# Altium PCB Node Controller v2 - old.PcbDoc
Units mil, origin at the board's own origin, x right, y up, seen from the top; angles counter-clockwise.
Board outline 2440.94 x 1377.95 mil, 2 copper layers (Top Layer, Bottom Layer); 38 components, 27 nets, 150 pads, 64 vias.
Unrouted connection lines stored in the file: 4.
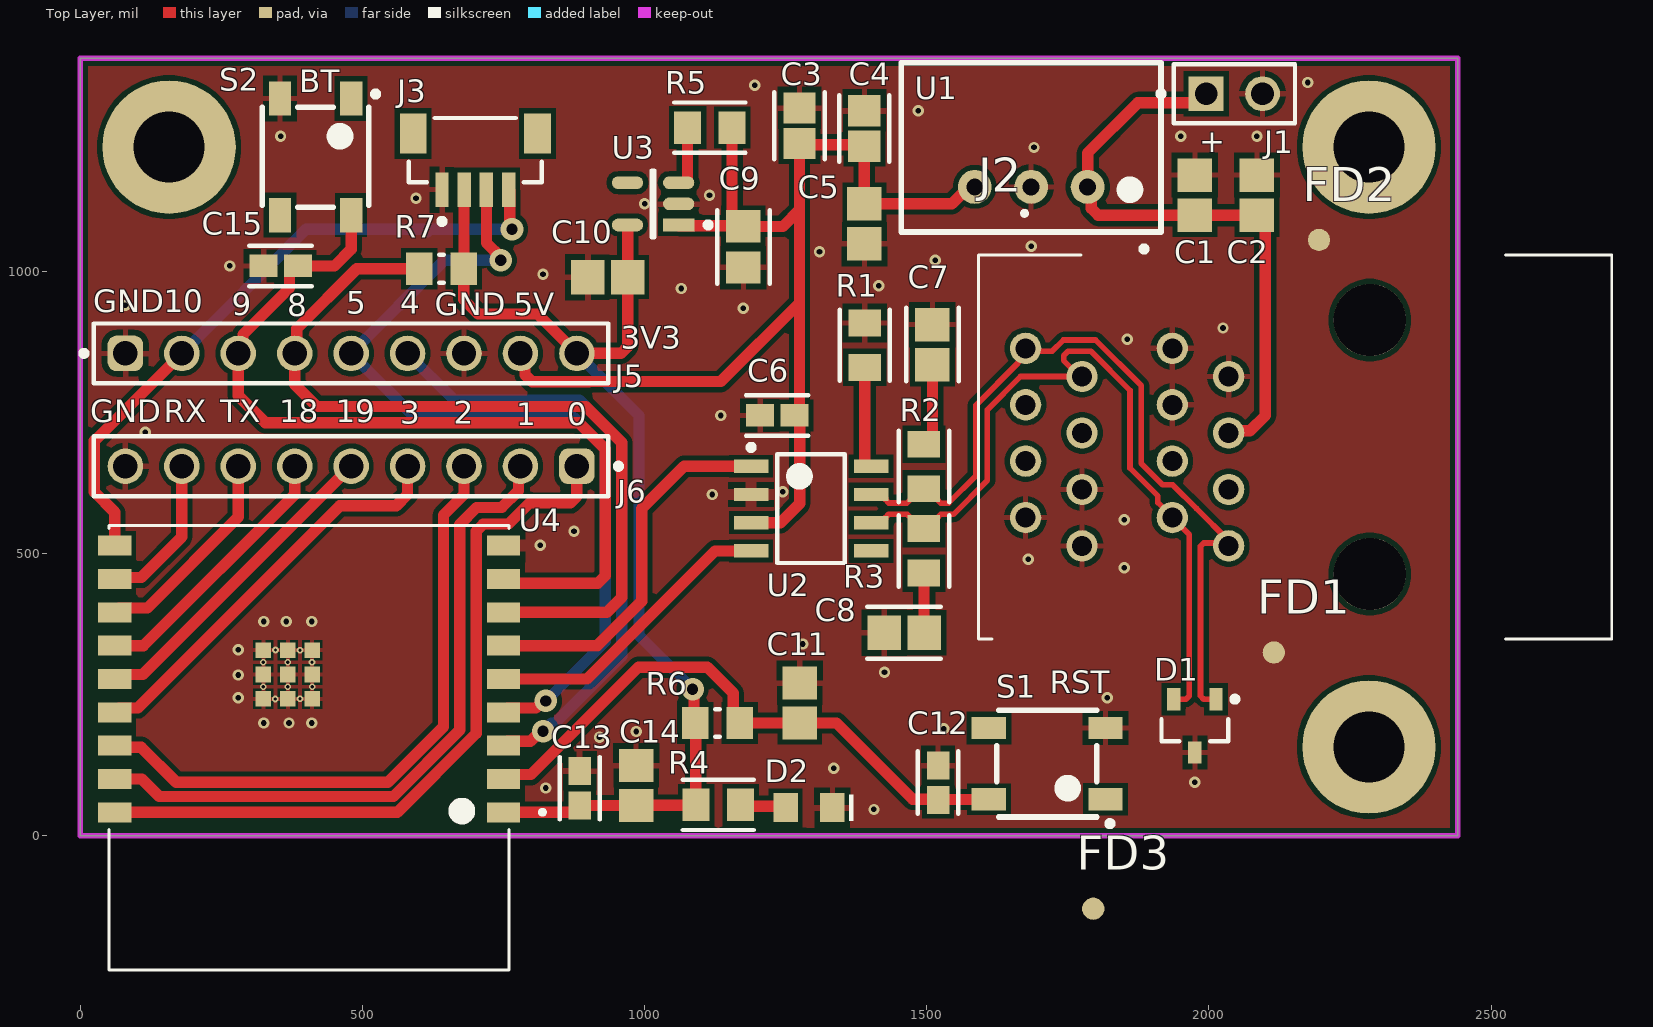
[diagram p0: Top Layer view]
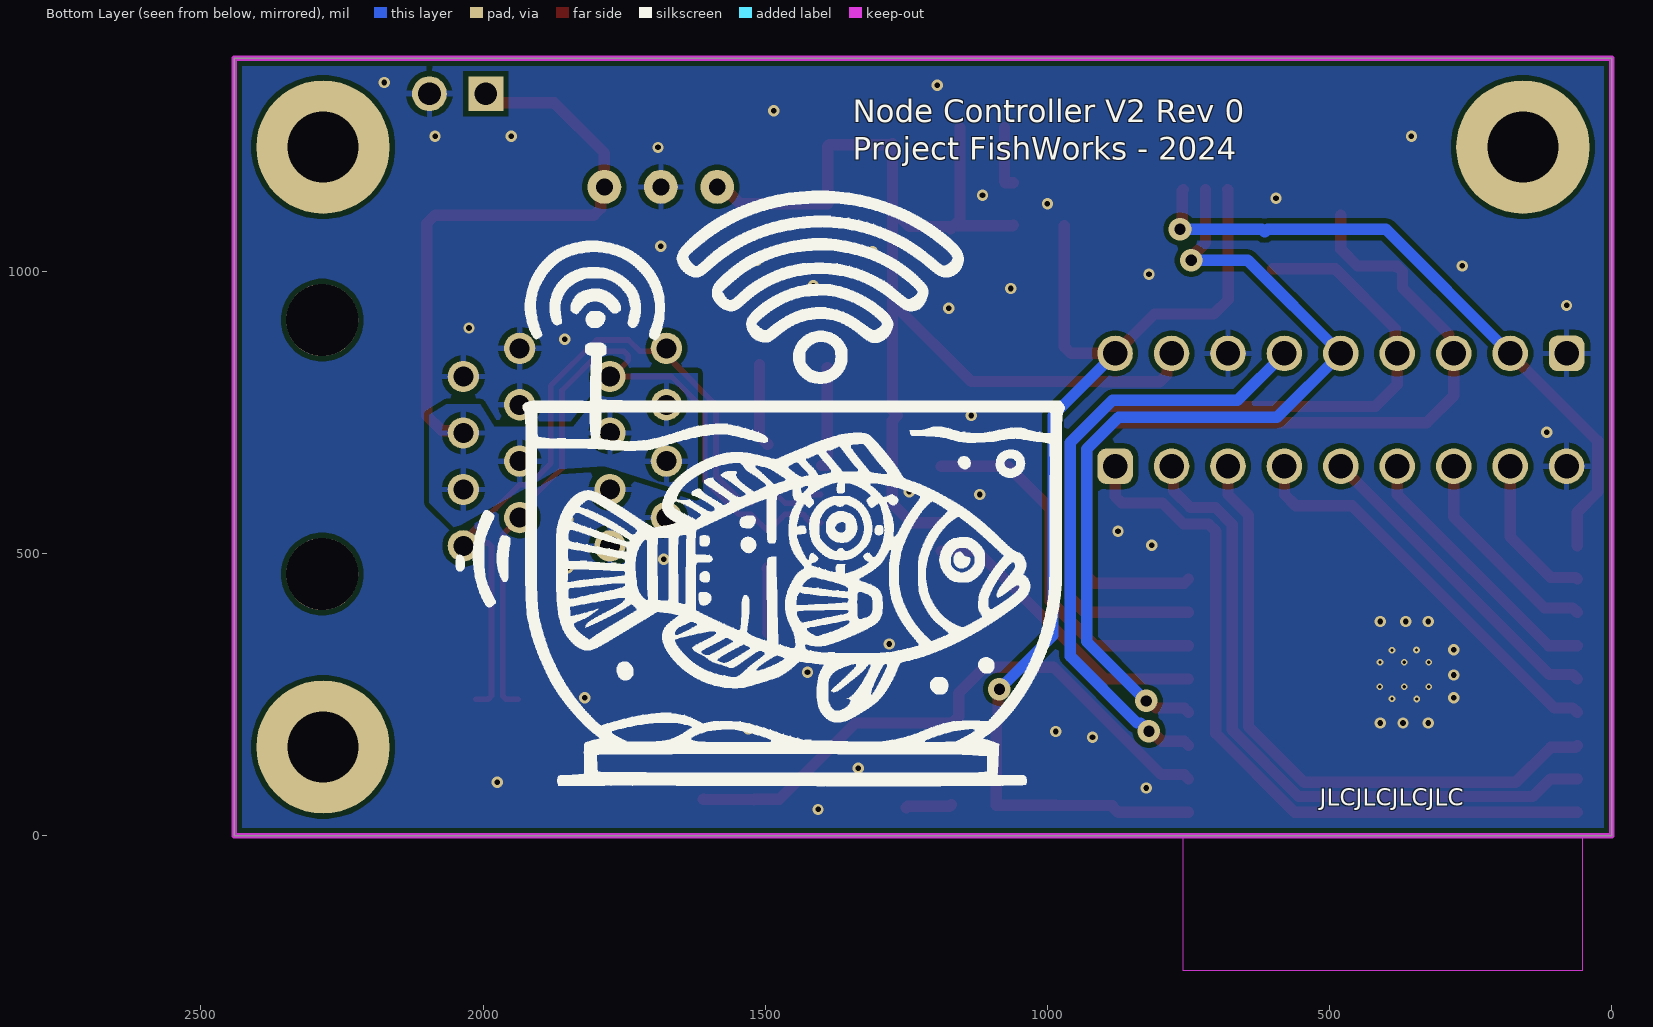
[diagram p1: Bottom Layer view, seen from below]
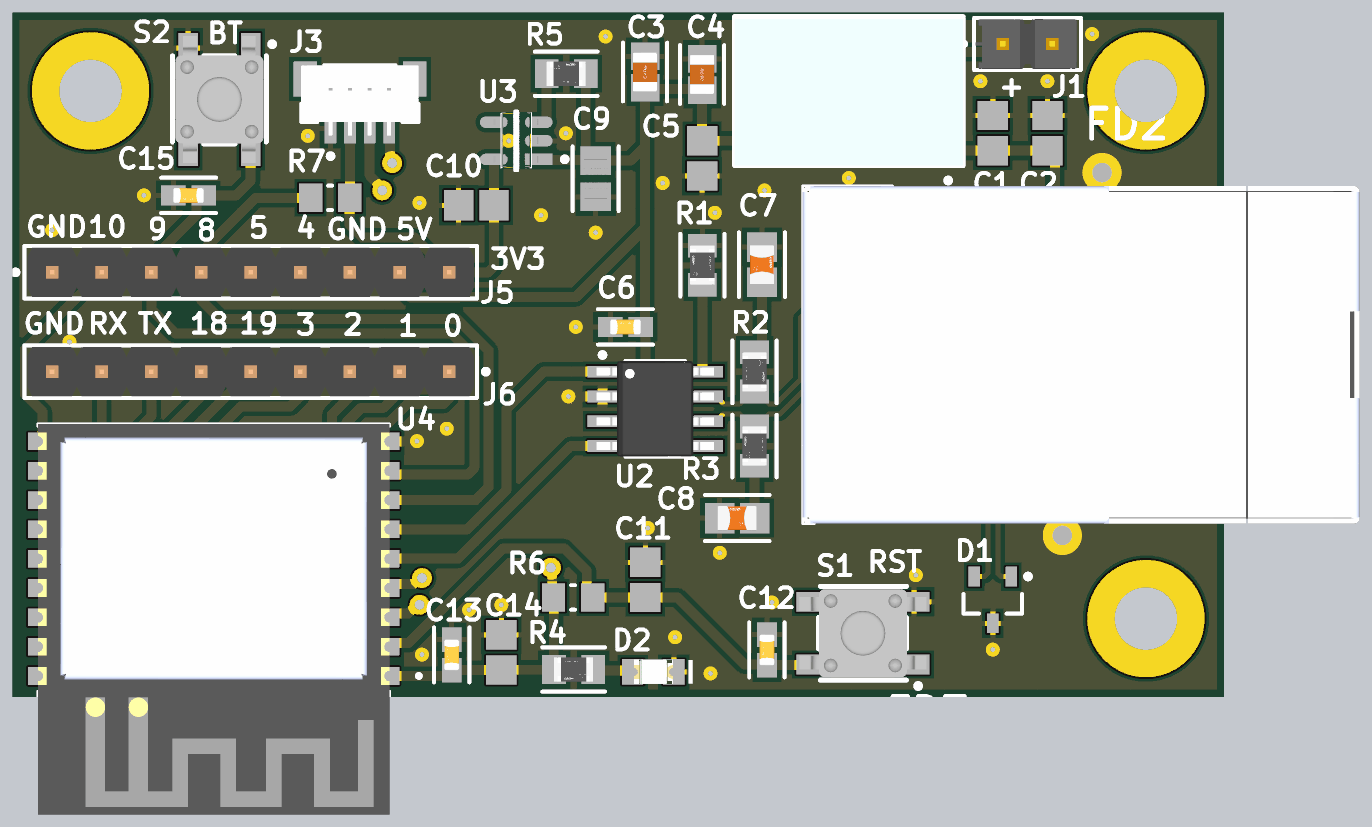
[diagram p2: 3D render of the assembled board from above, using the file's embedded part models]

## Layer stack, top to bottom
Top Solder: solder mask 0.4, Solder Resist, Dk 3.5
Top Layer: signal copper 1.4
Dielectric 1: dielectric 12.6, FR-4, Dk 4.8
Bottom Layer: signal copper 1.4
Bottom Solder: solder mask 0.4, Solder Resist, Dk 3.5

## Board outline
0,0 0,1377.95 2440.94,1377.95 2440.94,0

## Design rules (kind name [scope] priority, off if disabled: settings)
Clearance [All] p1: gap=9 ignorepadtopadclearanceinfootprint=TRUE except(3.94: Arc-Arc Arc-Track Track-Track; 11: Arc-Hole Track-Hole)
DiffPairsRouting [All] p1: maxlimit=30 minlimit=7 mostfreqgap=10 toplayer_minwidth=10 toplayer_maxwidth=20 toplayer_prefwidth=10 bottomlayer_minwidth=10 bottomlayer_maxwidth=20 bottomlayer_prefwidth=10 maxuncoupledlength=500
HoleSize [All] p1: absolutevalues=TRUE maxlimit=248.03 minlimit=5.91 maxpercent=80.000 minpercent=20.000
MinimumSolderMaskSliver [All] p1: minsoldermaskwidth=3.94
PlaneClearance [All] p1: clearance=9
PlaneConnect [All] p1: planeconnectstyle=Relief reliefexpansion=10 reliefentries=4 reliefconductorwidth=10 reliefairgap=10
PolygonConnect PolygonConnect_ESP32 [HasFootprint('ESP32-C3-WROOM-02')] p1: thpad.connectstyle=Relief thpad.reliefconductorwidth=10 thpad.reliefentries=4 thpad.polygonreliefangle="90 Angle" thpad.airgapwidth=10 smdpad.connectstyle=Relief smdpad.reliefconductorwidth=8 smdpad.reliefentries=4 smdpad.polygonreliefangle="90 Angle" smdpad.airgapwidth=4 via.connectstyle=Relief via.reliefconductorwidth=10 via.reliefentries=4 via.polygonreliefangle="90 Angle" via.airgapwidth=10
PolygonConnect [All] p2: connectstyle=Relief reliefconductorwidth=10 reliefentries=4 polygonreliefangle="90 Angle" airgapwidth=10
RoutingVias [All] p1: holewidth=20 width=40 viastyle="Through Hole" minholewidth=10 minwidth=20 maxholewidth=20 maxwidth=40
SolderMaskExpansion [All] p1: expansion=4 istentingtop=FALSE
SupplyNets "Schematic Supply Nets_3" [InNet('GND')] p1: voltage=0.000
SupplyNets "Schematic Supply Nets_2" [InNet('+24V')] p2: voltage=0.000
SupplyNets "Schematic Supply Nets_1" [InNet('+5.0V')] p3: voltage=0.000
SupplyNets "Schematic Supply Nets" [InNet('+3.3V')] p4: voltage=0.000
Width [All] p1: maxlimit=160 minlimit=4 preferedwidth=20 minimp=50.000000 maximp=50.000000 favimp=50.000000
25 further rules are at their usual default settings.

## Classes and differential pairs
differential pair CAN: +CAN_P -CAN_N

## Components (designator, comment, footprint, x,y, rotation, side; value= is the part's Value field where it differs from the comment)
C1 "10uF" CAPC2013X145X50ML20T25 1975,1135.43 r270 top
C2 "10uF" CAPC2013X145X50ML20T25 2085,1135.43 r270 top
C3 "22uF" FP-GMC21R-IPC_B 1274.45,1258.49 r90 top
C4 "22uF" FP-GMC21R-IPC_B 1389.45,1253.49 r90 top
C5 "10uF" CAPC2013X145X50ML20T25 1389.45,1084.57 r90 top
C6 "0.1uF" FP-CC0603-DA-IPC_A 1235,745 r180 top value=100nF
C7 "560pF" FP-CC0805-0_85-IPC_A 1510,870.46 r90 top
C8 "560pF" FP-CC0805-0_85-IPC_A 1460,360 r180 top
C9 "1uF" FP-CL21-IPC_A 1175,1043.55 r270 top value=1µF
C10 "10uF" CAPC2013X145X50ML20T25 934.57,990 r0 top
C11 "10uF" CAPC2013X145X50ML20T25 1275,235.43 r270 top
C12 "0.1uF" FP-CC0603-DA-IPC_A 1520,94.41 r270 top value=100nF
C13 "0.1uF" FP-CC0603-DA-IPC_A 885,84.41 r270 top value=100nF
C14 "10uF" CAPC2013X145X50ML20T25 985,89.25 r270 top
C15 "0.1uF" FP-CC0603-DA-IPC_A 355,1010 r0 top value=100nF
D1 "DESD1CAN2SOQ-7" SOT95P245X110-3N 1975,195 r270 top
D2 "150080VS75000" WL-SMCW_0805_150080xx75000 1291.34,50 r180 top
FD1 "JLC FID1X2R" FID1X2R 2115,325 r0 top
FD2 "JLC FID1X2R" FID1X2R 2195,1056 r90 top
FD3 "JLC FID1X2R" FID1X2R 1795,-129 r90 top
J1 "TSW-102-07-G-S" FP-TSW-102-07-G-S-MFG 2045,1315 r0 top
J2 "E5908-0T0343-L" E5908-0T0343-L-Footprint-1 2285,688.98 r90 top
J3 "BM04B-SRSS-TBT(LF)(SN)" FP-BM04B-SRSS-TBT_LF_SN-MFG 700,1215 r0 top
J5 "61300911121" 61300911121 480,855 r0 top
J6 "61300911121" 61300911121 480,655 r180 top
R1 "4.7k" FP-RT0805-IPC_A 1390,869.45 r90 top value=4.7kR
R2 "100" FP-RT0805-0_6-IPC_A 1495,654.45 r270 top value=100R
R3 "100" FP-RT0805-0_6-IPC_A 1495,505 r90 top value=100R
R4 "1.5k" FP-RT0805-IPC_A 1130.55,55 r180 top value=1.5kR
R5 "100k" FP-RT0805-IPC_A 1115.55,1255 r0 top value=100kR
R6 "10k" RESC2013X60X35ML10T20 1129.37,200 r180 top value=10kR
R7 "10k" RESC2013X60X35ML10T20 640,1005 r0 top value=10kR
S1 "PTS647SN50SMTR2LFS" PTS647SN50SMTR2LFS-Footprint-1 1816.69,65 r180 top
S2 "PTS647SN50SMTR2LFS" PTS647SN50SMTR2LFS-Footprint-1 480,1306.69 r270 top
U1 "TR10S05" TR10S05-Footprint-1 1785,1150 r180 top
U2 "MCP2551-I/SN" MCHP-SN8_V 1295,580 r0 top
U3 "AP2112K-3.3TRG1" FP-SOT25-IPC_B 1015,1120 r180 top
U4 "ESP32-C3-WROOM-02" ESP32-C3-WROOM-02 750,41.89 r180 top

## Footprints (in the part's own frame and the unit in brackets; to place one, negate y for a bottom-side part, rotate by r counter-clockwise, add the part's x,y. Pads: shape width x height; smd on the part's side, far side on the other; paste and mask are expansions set on the pad)
61300911121 [mm] "Pin Header, pitch 2.54 mm, THT, Vertical, single row, 9p"
  rrect50% 1.6x1.6 hole 1.1: 1(-10.16,0)
  round 1.6 hole 1.1: 2(-7.62,0) 3(-5.08,0) 4(-2.54,0) 5(0,0) 6(2.54,0) 7(5.08,0) 8(7.62,0) 9(10.16,0)
  silkscreen extent -12.15,-1.35 11.58,1.35, body extent -11.43,-1.27 11.43,1.27, height 8.57
CAPC2013X145X50ML20T25 [mm] "Chip Capacitor, 2-Leads, Body 2.00x1.25mm, IPC Low Density"
  rect 1.5x1.55 smd: 1(-0.9,0) 2(0.9,0)
  body extent -1.1,-0.72 1.1,0.72, height 1.45
E5908-0T0343-L-Footprint-1 [mm]
  round 1.408 hole 0.9: 1B(-4.445,6.35) 1T(4.445,15.49) 2B(-3.175,8.89) 2T(3.175,12.95) 3B(-1.905,6.35) 3T(1.905,15.49) 4B(-0.635,8.89) 4T(0.635,12.95) 5B(0.635,6.35) 5T(-0.635,15.49) 6B(1.905,8.89) 6T(-1.905,12.95) 7B(3.175,6.35) 7T(-3.175,15.49) 8B(4.445,8.89) 8T(-4.445,12.95)
  round 3.25 hole 3.25 unplated: ""(-5.715,0) ""(5.715,0)
  silkscreen extent -8.64,-10.89 10.62,17.61, body extent -8.64,-10.89 8.64,17.61, height 25.3
ESP32-C3-WROOM-02 [mm]
  rect 1.5x0.9 smd: 1(0,0) 2(0,-1.5) 3(0,-3) 4(0,-4.5) 5(0,-6) 6(0,-7.5) 7(0,-9) 8(0,-10.5) 9(0,-12) 10(17.5,-12) 11(17.5,-10.5) 12(17.5,-9) 13(17.5,-7.5) 14(17.5,-6) 15(17.5,-4.5) 16(17.5,-3) 17(17.5,-1.5) 18(17.5,0)
  rect 0.7x0.7 smd: 19(8.61,-5.1) 19(8.61,-7.3) 19(8.61,-6.2) 19(9.71,-5.1) 19(9.71,-7.3) 19(9.71,-6.2) 19(10.81,-5.1) 19(10.81,-7.3) 19(10.81,-6.2)
  Keep-Out Layer region: 17.75,1.1 -0.25,1.1 -0.25,7.1 17.75,7.1
  Keep-Out Layer region: 17.75,1.1 -0.25,1.1 -0.25,7.1 17.75,7.1
  silkscreen extent -1.85,-12.9 17.75,7.1, body extent -0.25,-12.9 17.75,7.1, height 3.35
FID1X2R [mm] "Fiducial - Round 1x2mm"
  round 1 smd mask-2539.97: 0(0,0)
FP-BM04B-SRSS-TBT_LF_SN-MFG [mm]
  rect 0.6x1.55 smd paste+0 mask+0: 1(-1.5,-1.775) 2(-0.5,-1.775) 3(0.5,-1.775) 4(1.5,-1.775)
  rect 1.2x1.8 smd paste+0 mask+0: 5(-2.8,0.75) 6(2.8,0.75)
  silkscreen extent -3,-3.32 3,1.45, body extent -3.5,-2.65 3.5,1.75, height 0.25
FP-CC0603-DA-IPC_A [mil]
  rect 49.53x39.85 smd paste+0 mask+0: 1(-30.59,0) 2(30.59,0)
  silkscreen extent -55,-36 55,36, body extent -75,-40 75,40, height 10
FP-CC0805-0_85-IPC_A [mil]
  rect 59.24x61.27 smd paste+0 mask+0: 1(-35.46,0) 2(35.46,0)
  silkscreen extent -65,-46 65,46, body extent -85,-50 85,50, height 10
FP-CL21-IPC_A [mil]
  rect 57.27x61.27 smd paste+0 mask+0: 1(-36.45,0) 2(36.45,0)
  silkscreen extent -65,-46 65,46, body extent -85,-50 85,50, height 10
FP-GMC21R-IPC_B [mil]
  rect 55.25x57.33 smd paste+0 mask+0: 1(-31.51,0) 2(31.51,0)
  silkscreen extent -59,-44 59,44, body extent -69,-39 69,39, height 10
FP-RT0805-0_6-IPC_A [mil]
  rect 47.56x57.56 smd paste+0 mask+0: 1(-39.45,0) 2(39.45,0)
  silkscreen extent -63,-45 63,45, body extent -83,-48 83,48, height 10
FP-RT0805-IPC_A [mil]
  rect 47.56x57.56 smd paste+0 mask+0: 1(-39.45,0) 2(39.45,0)
  silkscreen extent -63,-45 63,45, body extent -83,-48 83,48, height 10
FP-SOT25-IPC_B [mm]
  rect 1.407x0.576 smd paste+0 mask+0: 1(-1.151,0.95)
  rrect100% 1.407x0.576 smd paste+0 mask+0: 2(-1.151,0) 3(-1.151,-0.95) 4(1.151,-0.95) 5(1.151,0.95)
  silkscreen extent -2.6,-1.5 0.05,1.5, body extent -2.1,-1.75 2.1,1.75, height 0.25
FP-TSW-102-07-G-S-MFG [mm]
  rect 1.57x1.57 hole 1.02 paste-2539.97 mask+0: 1(-1.27,0)
  round 1.57 hole 1.02 paste-2539.97 mask+0: 2(1.27,0)
  silkscreen extent -3.42,-1.34 2.73,1.34, body extent -2.83,-1.44 2.83,1.44, height 0.25
MCHP-SN8_V [mm] "SOIC, 8-Leads, Body 4.9x3.9mm, Pitch 1.27mm"
  rect 1.55x0.6 smd: 1(-2.7,1.905) 2(-2.7,0.635) 3(-2.7,-0.635) 4(-2.7,-1.905) 5(2.7,-1.905) 6(2.7,-0.635) 7(2.7,0.635) 8(2.7,1.905)
  silkscreen extent -2.82,-2.45 1.53,2.88, body extent -3,-2.45 3,2.45, height 1.75
PTS647SN50SMTR2LFS-Footprint-1 [mm]
  rect 1.55x1 smd: 1(0,0) 2(5.25,0) 3(0,-3.2) 4(5.25,-3.2)
  silkscreen extent -0.33,-4 4.9,1.22, body extent -0.63,-3.85 5.88,0.65, height 5
RESC2013X60X35ML10T20 [mm] "Chip Resistor, 2-Leads, Body 2.00x1.25mm, IPC Low Density"
  rect 1.2x1.45 smd: 1(-1,0) 2(1,0)
  silkscreen extent -0.1,-0.63 0.1,0.63, body extent -1.05,-0.67 1.05,0.67, height 0.6
SOT95P245X110-3N [mm] "SOT23, 3-Leads, Body 2.90x2.45mm, Pitch 0.95mm, IPC Medium Density"
  rect 1x0.6 smd: 1(-1.2,0.95) 2(-1.2,-0.95) 3(1.2,0)
  silkscreen extent -1.32,-1.5 0.7,1.93, body extent -0.7,-1.5 0.7,1.5, height 1.1
TR10S05-Footprint-1 [mil]
  round 60 hole 30: 1(0,0) 2(100,0) 3(200,0)
  silkscreen extent -130,-220 330,115, body extent -130,-215 330,80, height 400
WL-SMCW_0805_150080xx75000 [mm] "SMD Mono-color Chip LED, body 2.0x1.25mm"
  rect 1.1x1.3 smd: 1(-1.05,0) 2(1.05,0)
  silkscreen extent -2,-0.6 -1.8,0.6, body extent -1,-0.63 1,0.62, height 0.7

## Part data
C1 C2 C5 C10 C11 C14: library part CMP-00010-1, "Ceramic Capacitor, Multilayer, Ceramic, 10V, 80% +Tol, 20% -Tol, Y5V, -82/+22% TC, 10uF, Surface Mount, 0805", Capacitor Type=Ceramic, Case/Package=0805, Max Operating Temperature=85°C, Min Operating Temperature=-30°C, Package Shape=Rectangular, Package Style=SMTMeter, Rated DC Voltage (URdc)=10V, Temperature Characteristics Code=Y5V, Tolerance  (fill in as +-)=20%, Tolerance (fill in as +-)=80%, Dielectric Material=Ceramic, Height=1.25mm, JESD-609 Code=e3, Length=2mm, Mounting Technology="Surface Mount", Multilayer=Yes, Packaging="Tape and Reel", Pins=2, Reach SVHC Compliant=Yes, RoHS Compliant=Yes, Terminal Finish=Nickel, Termination=Wraparound, Width=1.25mm
C3 C4: library part CMP-00027-1, "Ceramic Capacitor, Multilayer, Ceramic, 35V, 20% +Tol, 20% -Tol, X5R, 15% TC, 22uF, Surface Mount, 0805"
C6 C12 C13 C15: library part CMP-00002-1, "Ceramic Capacitor, Multilayer, Ceramic, 50V, 10% +Tol, 10% -Tol, X7R, 15% TC, 0.1uF, Surface Mount, 0603", Capacitor Type=Ceramic, Case/Package=0603, Max Operating Temperature=125°C, Min Operating Temperature=-55°C, Package Shape=Rectangular, Package Style=SMTMeter, Rated DC Voltage (URdc)=50V, Temperature Characteristics Code=X7R, Tolerance  (fill in as +-)=10%, Dielectric Material=Ceramic, Height=0.8mm, JESD-609 Code=e3, Length=1.6mm, Mounting Technology="Surface Mount", Multilayer=Yes, Packaging="Tape and Reel", Pins=2, Reach SVHC Compliant=Yes, RoHS Compliant=Yes, Terminal Finish=Nickel, Termination=Wraparound, Tolerance (fill in as +-)=10%, Width=0.8mm
C7 C8: library part CMP-00033-1, "Ceramic Capacitor, Multilayer, Ceramic, 50V, 10% +Tol, 10% -Tol, X7R, 15% TC, 0.00056uF, Surface Mount, 0805", Capacitor Type=Ceramic, Case/Package=0805, Max Operating Temperature=125°C, Min Operating Temperature=-55°C, Package Shape=Rectangular, Rated DC Voltage (URdc)=50V, Temperature Characteristics Code=X7R, Tolerance  (fill in as +-)=10%, Dielectric Material=Ceramic, JESD-609 Code=e3, Mounting Technology="Surface Mount", Multilayer=Yes, Packaging="Tape and Reel", Pins=2, Reach SVHC Compliant=Yes, RoHS Compliant=Yes, Terminal Finish=Nickel, Termination=Wraparound, Tolerance (fill in as +-)=10%
C9: library part CMP-00019-1, "Ceramic Capacitor, Multilayer, Ceramic, 50V, 10% +Tol, 10% -Tol, X7R, 15% TC, 1uF, Surface Mount, 0805", Capacitor Type=Ceramic, Case/Package=0805, Max Operating Temperature=125°C, Min Operating Temperature=-55°C, Package Shape=Rectangular, Package Style=SMTMeter, Rated DC Voltage (URdc)=50V, Temperature Characteristics Code=X7R, Tolerance  (fill in as +-)=10%, Dielectric Material=Ceramic, Height=1.35mm, JESD-609 Code=e3, Length=2mm, Mounting Technology="Surface Mount", Multilayer=Yes, Packaging="Tape and Reel", Pins=2, Reach SVHC Compliant=Yes, RoHS Compliant=Yes, Terminal Finish=Nickel, Termination=Wraparound, Tolerance (fill in as +-)=10%, Width=1.25mm
D1: library part CMP-00024-2, "Trans Voltage Suppressor Diode, 200W, 24V V(RWM), Bidirectional, 2 Element, Silicon", Max Breakdown Voltage=30.3V, Max Operating Temperature=150°C, Max Power Dissipation=300mW, Min Breakdown Voltage=25.4V, Min Operating Temperature=-65°C, Non-rep Peak Rev Power Dis-Max=200W, Package Body Material=Plastic, Package Shape=Rectangular, Package Style="SMALL OUTLINEMeter", Peak Reflow Temperature (Cel)=260°C, Rep Pk Reverse Voltage-Max=24V, Time @ Peak Reflow Temperature-Max (s)=30s, Additional Feature="HIGH RELIABILITY", Diode Element Material=SILICON, Diode Type="TRANS VOLTAGE SUPPRESSOR", JESD-30 Code=R-PDSO-G3, JESD-609 Code=e3, Moisture Sensitivity Level=1, Number of Elements=2, Pins=3, Polarity=Bidirectional, Reach SVHC Compliant=Yes, Reference Standard=AEC-Q101, RoHS Compliant=Yes, Surface Mount=Yes, Technology=AVALANCHE, Terminal Finish=Tin, Terminal Form="Gull Wing", Terminal Position=DUAL
D2: library part CMP-00021-1, "Single Color LED, Bright Green, Water Clear, 1.4mm", Color=Green, Forward Current=30mA, Max Operating Temperature=85°C, Min Operating Temperature=-40°C, Channels=1, Lens Style="WATER CLEAR", Luminous Intensity-Nom=40mcd, Mounting Technology="Surface Mount", Optoelectronic Device Type="SINGLE COLOR LED", Overall Height=0.7mm, Packaging="Tape and Reel", Pins=2, Reach SVHC Compliant=Yes, RoHS Compliant=Yes, Shape=Rectangular, Size=1.4mm, Terminal Pitch=2.1mm, Viewing Angle=140°
FD1 FD2 FD3: library part CMP-00028-00011-4, "Fiducial - Round 1x2mm", Pins=0
J1: library part CMP-00020-2, "Board Connector, 2 Contact(s), 1 Row(s), Male, Straight, 0.1 inch Pitch, Solder Terminal, Black Insulator", Flammability Rating="UL94 V-0", Insulation Color=Black, Additional Feature=E.L.P., Body Breadth=0.1inch, Body Depth=0.1inch, Body/Shell Style=RECEPTACLE, Connector Type="BOARD CONNECTOR", Contact Finish - Mating="GOLD (10) OVER NICKEL (50)", Contact Finish - Termination="Gold (Au) - with Nickel (Ni) barrier", Contact Gender=Male, Contact Material=Bronze, Contact Pattern=RECTANGULAR, Contact Style="SQ PIN-SKT", DIN Conformance=No, Filter Feature=No, IEC Conformance=No, Insulation Material=Glass, JESD-609 Code=e4, Mating Contact Pitch=0.1inch, Mating Information="MULTIPLE MATING PARTS AVAILABLE", MIL Conformance=No, Mixed Contacts=No, Mounting Style=STRAIGHT, Mounting Technology=Board, Number Of Connectors=1, Number of Contacts=2, Number Of PCB Rows=1, Number of Rows Loaded=1, Option="General Purpose", PCB Contact Pattern=RECTANGULAR, Plating Thickness=10uin, Reach SVHC Compliant=Yes, Reference Standard=UL, Reliability=COMMERCIAL, RoHS Compliant=Yes, Terminal Length=0.1inch, Terminal Pitch=2.54mm, Termination=Solder
J2: library part CMP-002-00077-7, "Telecom and Datacom Connector, 16 Contact(s), Female, Right Angle, Solder Terminal, Jack", Flammability Rating="UL94 V-0", Manufacturer Series=E5908, Body/Shell Style=JACK, Connector Type="TELECOM AND DATACOM CONNECTOR", Contact Finish - Mating="GOLD (15) OVER NICKEL", Contact Finish - Termination="GOLD (15) OVER NICKEL", Contact Gender=Female, DIN Conformance=No, Empty Shell=No, Filter Feature=No, IEC Conformance=No, Insulation Material=Glass, JESD-609 Code=e4, MIL Conformance=No, Mixed Contacts=No, Mounting Style="RIGHT ANGLE", Mounting Technology=Board, Number of Contacts=16, Option="General Purpose", Reach SVHC Compliant=Yes, RoHS Compliant=Yes, Shell Material=Glass, Termination=Solder
J3: library part CMP-002-00076-4, "1.0mm Pitch, Ultra-Compact, Low Profile Design, Interchangeable Shrouded Header"
J5 J6: library part CMP-00023-3, "Board Connector, 9 Contact(s), 1 Row(s), Male, Straight, 0.1 inch Pitch, Solder Terminal, Locking, Black Insulator, Plug", Contact Resistance=20mR, Dielectric Withstanding Voltage (AC)=500V, Insulation Color=Black, Insulation Resistance=1GR, Max Operating Temperature=125°C, Min Operating Temperature=-40°C, Rated Current (Signal)=3A, Body Breadth=0.1inch, Body Depth=0.1inch, Body Length=0.9inch, Body/Shell Style=PLUG, Connector Type="BOARD CONNECTOR", Contact Finish - Mating=GOLD, Contact Finish - Termination="Gold (Au) - with Nickel (Ni) barrier", Contact Gender=Male, Contact Material="Copper Alloy", Contact Pattern=RECTANGULAR, Contact Style="SQ PIN-SKT", Insulation Material=Polybutylene, JESD-609 Code=e4, Mating Contact Pitch=0.1inch, Mounting Option 1=LOCKING, Mounting Style=STRAIGHT, Mounting Technology=Board, Number Of Connectors=1, Number of Contacts=9, Number of Rows Loaded=1, PCB Contact Pattern=RECTANGULAR, Reach SVHC Compliant=Yes, Reference Standard=UL, Reliability=COMMERCIAL, RoHS Compliant=Yes, Terminal Length=0.118inch, Terminal Pitch=2.54mm, Termination=Solder
R1: library part CMP-00015-1, "Fixed Resistor, Thin Film, 0.125W, 4700ohm, 150V, 1% +/-Tol, 50ppm/Cel, Surface Mount, 0805", Case/Package=0805, Max Operating Temperature=155°C, Min Operating Temperature=-55°C, Package Height=0.5mm, Package Length=2mm, Package Style=SMTMeter, Package Width=1.25mm, Power=125mW, Rated Temperature=70°C, Resistor Type="FIXED RESISTOR", Temperature Coefficient=50ppm/°C, Tolerance=1%, Working Voltage=150V, Additional Feature="HIGH PRECISION", Construction=Chip, Mounting Technology="Surface Mount", Packaging="Tape and Reel", Pins=2, Reach SVHC Compliant=Yes, RoHS Compliant=Yes, Technology="THIN FILM", Termination=Wraparound
R2 R3: library part CMP-00016-1, "Fixed Resistor, Thin Film, 0.125W, 100ohm, 150V, 0.1% +/-Tol, 25ppm/Cel, Surface Mount, 0805", Case/Package=0805, Max Operating Temperature=155°C, Min Operating Temperature=-55°C, Package Height=0.5mm, Package Length=2mm, Package Style=SMTMeter, Package Width=1.25mm, Power=125mW, Rated Temperature=70°C, Resistor Type="FIXED RESISTOR", Temperature Coefficient=25ppm/°C, Tolerance=0.1%, Working Voltage=150V, Additional Feature="HIGH PRECISION", Construction=Chip, Mounting Technology="Surface Mount", Packaging="Tape and Reel", Pins=2, Reach SVHC Compliant=Yes, RoHS Compliant=Yes, Technology="THIN FILM", Termination=Wraparound
R4: library part CMP-00013-1, "Fixed Resistor, Thin Film, 0.125W, 1500ohm, 150V, 1% +/-Tol, 50ppm/Cel, Surface Mount, 0805", Case/Package=0805, Max Operating Temperature=155°C, Min Operating Temperature=-55°C, Package Height=0.5mm, Package Length=2mm, Package Style=SMTMeter, Package Width=1.25mm, Power=125mW, Rated Temperature=70°C, Resistor Type="FIXED RESISTOR", Temperature Coefficient=50ppm/°C, Tolerance=1%, Working Voltage=150V, Additional Feature="HIGH PRECISION", Construction=Chip, Mounting Technology="Surface Mount", Packaging="Tape and Reel", Pins=2, Reach SVHC Compliant=Yes, RoHS Compliant=Yes, Technology="THIN FILM", Termination=Wraparound
R5: library part CMP-00014-1, "Fixed Resistor, Thin Film, 0.125W, 100000ohm, 150V, 1% +/-Tol, 50ppm/Cel, Surface Mount, 0805", Case/Package=0805, Max Operating Temperature=155°C, Min Operating Temperature=-55°C, Package Height=0.5mm, Package Length=2mm, Package Style=SMTMeter, Package Width=1.25mm, Power=125mW, Rated Temperature=70°C, Resistor Type="FIXED RESISTOR", Temperature Coefficient=50ppm/°C, Tolerance=1%, Working Voltage=150V, Additional Feature="HIGH PRECISION", Construction=Chip, Mounting Technology="Surface Mount", Packaging="Tape and Reel", Pins=2, Reach SVHC Compliant=Yes, RoHS Compliant=Yes, Technology="THIN FILM", Termination=Wraparound
R6 R7: library part CMP-00012-1, "Fixed Resistor, Metal Glaze/thick Film, 0.125W, 10000ohm, 150V, 1% +/-Tol, 100ppm/Cel, Surface Mount, 0805", Case/Package=0805, Max Operating Temperature=155°C, Min Operating Temperature=-55°C, Package Height=0.5mm, Package Length=2mm, Package Shape=Rectangular, Package Style=SMTMeter, Package Width=1.25mm, Power=125mW, Rated Temperature=70°C, Resistor Type="FIXED RESISTOR", Temperature Coefficient=100ppm/°C, Tolerance=1%, Working Voltage=150V, Additional Feature="LASER TRIMMABLE", Construction=Chip, JESD-609 Code=e3, Mounting Technology="Surface Mount", Packaging="Tape and Reel", Pins=2, Reach SVHC Compliant=Yes, RoHS Compliant=Yes, Technology="METAL GLAZE/THICK FILM", Terminal Finish=Nickel, Termination=Wraparound
S1 S2: library part CMP-011-00013-3, "Keypad Switch, 1 Switches, SPST, Momentary-tactile, 0.05A, 12VDC, 1.47N, Solder Terminal, Surface Mount-straight", RoHS Compliant=Yes
U1: library part CMP-019-00050-2, "DC-DC Regulated Power Supply Module", Reach SVHC Compliant=Yes, RoHS Compliant=Yes, Throw Configuration="DC-DC REGULATED POWER SUPPLY MODULE"
U2: library part CMP-015-00008-2, "CAN Transceiver, 1-Trnsvr, PDSO8", Case/Package=SOP, Max Operating Temperature=85°C, Max Supply Current=75uA, Min Operating Temperature=-40°C, Nominal Supply Voltage=5V, Package Body Material=Plastic, Package Equivalence Code=SOP8,.25, Package Shape=Rectangular, Package Style="SMALL OUTLINEMeter", Peak Reflow Temperature (Cel)=260°C, Temperature Grade=INDUSTRIAL, Time @ Peak Reflow Temperature-Max (s)=40s, Channels=1, Data Rate=1000Mbps, Height - Seated (Max)=1.75mm, JESD-30 Code=R-PDSO-G8, JESD-609 Code=e3, Length=4.9mm, Moisture Sensitivity Level=1, Number of Transceivers=1, Pins=8, Power Supplies=5V, Qualification Status="Not Qualified", Reach SVHC Compliant=Yes, RoHS Compliant=Yes, Surface Mount=Yes, Technology=CMOS, Telecom IC Type="INTERFACE CIRCUIT", Terminal Finish=Tin, Terminal Form="Gull Wing", Terminal Pitch=1.27mm, Terminal Position=DUAL, Width=3.9mm
U3: library part CMP-019-00049-4, "Fixed Positive LDO Regulator, 3.3V, 0.4V Dropout, CMOS, PDSO5", Case/Package=LSSOP, Max Operating Temperature=85°C, Max Supply Voltage=6V, Min Operating Temperature=-40°C, Pins=5, RoHS Compliant=Yes
U4: library part CMP-005-00015-5, Datasheet=https://www.espressif.com/sites/default/files/documentation/esp32-c3-wroom-02_datasheet_en.pdf, Design Item ID=ESP32-C3-WROOM-02, ki_description="ESP32-C3-WROOM-02 is a general-purpose Wi-Fi and Bluetooth LE module. This module features a rich set of peripherals and high performance, which makes it an ideal choice for smart home, industrial automation, health care, consumer electronics, etc.", ki_keywords="esp32-c3 module", Reference=U, Source=NodeController.SCHLIB

## Free pads (board coordinates)
  round 236.22 hole 125.98: 3(157.48,1220.47) 3(2283.46,157.48) 3(2283.46,1220.47)

## Via types
v1: diameter 20, hole 10, Top Layer to Bottom Layer, 49 vias
v2: diameter 11.81, hole 5.91, Top Layer to Bottom Layer, 10 vias
v3: diameter 40, hole 20, Top Layer to Bottom Layer, 5 vias

## Nets (pads, with @x,y where several pads share a name; then routed paths per layer and width w, separated by ;. In a path a pad name is that pad's centre, name@x,y a point inside that pad or via, vN(x,y) a via of type N, cw(c..) or ccw(c..) an arc to the next point about the centre after c; other vN are vias at no path point)
+3.3V: C10.2 C13.2 C14.2 J3.2 J5.9 R4.2 R6.2 R7.2 U3.5 U4.1 | length 1979.3
  Top Layer w20: J3.2 679.84,1144.65 679.84,1005.47 R7.2 679.37,950.63 705.16,924.84 810.16,924.84 J5.9 958.28,855 970,866.72 U3.5@970,1081.36 ; U4.1 875.08,41.89 885,51.81 C13.2 C14.2 985.59,54.41 1090.51,54.41 1090.55,54.45 1090.55,199.45 R6.2 1087.5,202.5 1087.5,257.5 v3(1085,260)
  Bottom Layer w20: J5.9 990,745 990,355 v3(1085,260)
+5.0V: C3.1 C4.1 C5.2 C6.1 C9.1 J5.8 R5.2 U1.3 U2.3 U3.1 | length 2172.5
  Top Layer w20: J5.8 788.23,846.77 788.23,817.17 800.9,804.5 900.92,804.5 901.41,805 1135.02,805 1274.45,944.43 ; U3.1 1061.6,1081.3 C9.1@1165.78,1081.3 ; R5.2 1155,1092.07 C9.1@1165.78,1081.3 ; U2.3 1240.95,555 1275,589.05 1275,735.59 C6.1 1274.45,753.86 1274.45,944.43 ; U1.3 1574.18,1150 1544.18,1120 C5.2 C4.1 1386.95,1224.48 1276.95,1224.48 C3.1 1274.45,1109.45 ; C9.1@1165.78,1081.3 1171.04,1076.04 C9.1 1245,1080 1274.45,1109.45 ; 1274.45,944.43 1274.45,1109.45
+24V: C1.2 C2.2 J1.1 J2.3B J2.3T J2.4B J2.4T J2.5B J2.5T U1.1 | length 1093.9
  Top Layer w20: J1.1@1995,1320 1974.09,1299.09 1874.09,1299.09 1785,1210 U1.1 1791.57,1143.43 1791.57,1111.72 1803.28,1100 C1.2 C2.2 2100,1085 2100,745 2072.8,717.8 2038.82,717.8 J2.5B
CAN_N: D1.2 J2.2B J2.2T R3.2 U2.6 | length 1386.6
  Top Layer w10: U2.6 1420,555 1426.81,561.81 1426.81,564.14 1432.67,570 1442.66,570 1442.93,569.72 1465.36,569.72 1471.22,563.87 1471.22,563.23 1490,544.45 R3.2 1500,544.45 1518.78,563.23 1518.78,563.87 1524.64,569.72 1547.07,569.72 1607.12,629.77 1607.12,754.93 1666.16,813.98 J2.2T@1761.02,813.98 ; J2.2T J2.2T@1761.02,813.98 ; D1.2 1959.14,242.24 1965,248.1 1965,533.98 J2.2B 1935,564.97 1909.44,590.54 1909.44,602.26 1860,651.7 1860,789.54 1790.78,858.77 1750.37,858.77 1742.44,850.84 1742.44,842.55 1761.02,823.96 J2.2T@1761.02,813.98
CAN_P: D1.1 J2.1B J2.1T R2.2 U2.7 | length 1453.8
  Top Layer w10: U2.7 1420,605 1426.81,598.19 1426.81,595.86 1432.67,590 1450.94,590 1451.22,589.72 1464.72,589.72 1490,615 R2.2 1500,615 1518.78,596.22 1518.78,595.58 1524.64,589.72 1538.78,589.72 1587.12,638.06 1587.12,763.22 1661.31,837.41 1661.31,837.84 1675.16,851.68 J2.1T 1680.17,858.97 1722.28,858.97 1742.08,878.77 1799.06,878.77 1880,797.83 1880,659.98 1917.72,622.26 1935.71,622.26 1977.94,580.04 2035,522.97 J2.1B 2029.99,518.99 1990.86,518.99 1985,513.13 1985,248.1 1990.86,242.24 D1.1
CAN_RX: U2.4 U4.6 | length 532.7
  Top Layer w20: 750,278.11 898.11,278.11 1125,505 U2.4
CAN_TX: U2.1 U4.5 | length 666.4
  Top Layer w20: 750,337.17 916.15,337.17 995,416.01 995,580 1070,655 U2.1
EN: C11.2 C12.2 R6.1 S1.2 U4.2 | length 1063.6
  Top Layer w20: U4.2 757.72,108.66 798.66,108.66 989,299 1111,299 1157.02,252.98 1157.02,211.72 R6.1 C11.2 1340,200 1474.92,65.08 C12.2@1520,65.08 ; C12.2 1520.59,64.41 1609.41,64.41 S1.2
GND: C1.1 C2.1 C3.2 C4.2 C5.1 C6.2 C7.2 C8.2 C9.2 C10.1 C11.1 C12.1 C13.1 C14.1 C15.1 D1.3 D2.1 J1.2 J2.6B J2.6T J2.7B J2.7T J2.8B J2.8T J3.1 J5.1 J5.7 J6.9 R1.2 S1.3 S2.3 U1.2 U2.2 U3.2 U4.9 U4.19
  other v1: 1406.33,46.96 825,85 1975,95 1335,120 920,175 985,185 1530,190 325,200 370,200 410,200 280,245 1820,245 280,285 1425,290 280,330 1280,340 325,380 365,380 410,380 1850,475 1680,490 815,515 875,540 1850,560 1120,605 1245,610 115,715 1135,745 1855,880 2025,900 1175,935 80,940 1065,970 1415,975 820,995 265,1010 1515,1020 1310,1035 1685,1045 1000,1120 595,1130 1115,1135 1690,1220 355,1240 1950,1240 2085,1240 1485,1285 1195,1330 2175,1335
  other v2: 345.54,242.57 389.39,242.84 324.15,264.35 367.79,264.37 411.16,264.24 324.51,307.67 367.53,307.64 410.78,307.6 345.86,329.4 389.42,329.07
GPIO0: J6.1 U4.18 | length 1314.1
  Top Layer w20: U4.18 561.89,41.89 701.47,181.47 701.47,490.46 701.47,539.92 714.28,552.72 758.73,552.72 796.01,590 868.28,590 880,601.72 J6.1
GPIO1: J6.2 U4.17 | length 1211
  Top Layer w20: U4.17 109.06,100.94 140,70 555,70 672.47,187.47 672.47,551.93 702.27,581.72 746.72,581.72 776.52,611.52 776.52,651.52 J6.2
GPIO2: J6.3 U4.16 | length 1126.8
  Top Layer w20: U4.16 63.87,157.15 107.85,157.15 170,95 545,95 643.47,193.47 643.47,568.47 680,605 J6.3
GPIO3: J6.4 U4.15 | length 728.8
  Top Layer w20: U4.15 68.74,226.77 101.77,226.77 460,585 560,585 580,605 J6.4
GPIO4: J5.6 U4.3 | length 1098.7
  Top Layer w20: U4.3 757.72,167.72 797.56,167.72 815.13,185.28 v3(820.13,185.28)
  Bottom Layer w20: J5.6 663.04,771.96 884.69,771.96 959.5,697.15 959.5,318.45 841.15,200.11 835.37,200.11 820.54,185.28 v3(820.13,185.28)
GPIO5: J3.4 J5.5 U4.4 | length 1562.8
  Top Layer w20: 719.68,1145.12 719.76,1145.04 719.76,1050.65 745,1025.41 v3(745,1020) ; U4.4 757.72,226.77 807.25,226.77 819.59,239.11 v3(825,239.11)
  Bottom Layer w20: v3(745,1020) 645,1020 J5.5 593.18,741.82 873.81,741.82 930.5,685.14 930.5,344.61 v3(825,239.11)
GPIO8: J5.4 R7.1 U4.7 | length 1478.4
  Top Layer w20: R7.1 490,1005 383.48,898.48 383.48,858.48 J5.4 380,800 419,761 895.65,761 959.5,697.15 959.5,422.43 933.28,396.22 U4.7
GPIO9: C15.2 J5.3 S2.2 U4.8 | length 1546
  Top Layer w20: C15.2@385.08,1009.49 380.23,1009.49 370.82,1000.08 370.82,970.82 288.23,888.23 288.23,863.23 J5.3 280,780 328,732 883.64,732 930.5,685.14 930.5,461.21 916.84,447.56 757.72,447.56 U4.8 ; C15.2 450.51,1010 480,1039.49 S2.2
GPIO10: J3.3 J5.2 U4.10 | length 1172.6
  Top Layer w20: U4.10 61.02,573.46 25,609.48 25,700 J5.2 ; 759.06,1145.12 760.81,1143.37 760.81,1084.61 765,1080.41 v3(765,1075)
  Bottom Layer w20: J5.2 400,1075 610,1075 615,1070 620,1075 v3(765,1075)
GPIO18: J6.6 U4.13 | length 479.9
  Top Layer w20: U4.13 112.17,337.17 380,605 J6.6
GPIO19: J6.5 U4.14 | length 575.1
  Top Layer w20: U4.14 68.74,285.83 110.83,285.83 J6.5
NetC7_1: C7.1 R2.1 | length 148
  Top Layer w20: R2.1 1496.22,693.9 1510,707.68 C7.1
NetC8_1: C8.1 R3.1 | length 108.6
  Top Layer w20: R3.1 1495.23,465.32 1495.23,360.23 C8.1 ; R3.1@1495,476.1 R3.1@1497.04,474.07
NetD2_2: D2.2 R4.1 | length 82.1
  Top Layer w20: R4.1 1172.5,52.5 1247.5,52.5 D2.2
NetR1_1: R1.1 U2.8 | length 197.5
  Top Layer w20: R1.1@1380,820 R1.1 1390,656.81 1390.51,656.3 U2.8@1400,656.3
NetR5_1: R5.1 U3.3 | length 112.7
  Top Layer w20: U3.3 1074.87,1157.4 1076.1,1158.64 R5.1
RXD: J6.8 U4.11 | length 274.9
  Top Layer w20: U4.11 63.73,457.98 107.98,457.98 180,530 J6.8
TXD: J6.7 U4.12 | length 378.9
  Top Layer w20: U4.12 68.74,403.94 118.94,403.94 280,565 J6.7
pads on no net: FD1.0 FD2.0 FD3.0 J2. J3.5 J3.6 S1.1 S1.4 S2.1 S2.4 U2.5 U3.4

## Polygon pours and split planes (outlines as drawn)
GND on Bottom Layer "Bottom GND" (solid, remove dead copper, pour order 8): 0,0 0,1377.95 2440.94,1377.95 2440.94,0
+24V on Bottom Layer "+24V_L02_P007" (solid, pour order 7): 1620,820 1620,602.4 1785,655 1865,650 2050,545 2095,590 2095,746.67 2065,765 2005,765 1980,725 1840,725 1765,820
GND on Top Layer "Top GND" (solid, remove dead copper, pour order 9): 0,0 0,1377.95 2440.94,1377.95 2440.94,0

## Keep-outs
Keep-Out Layer:
  the board outline again, w10

## Silkscreen, mask and mechanical layers (free items; w line width, h text height)
Top Overlay:
  text "BT" at 388,1318 h40
  text "+" at 1983,1211.34 h40
  text "GND" at 23,928 h40
  text "10" at 148,928 h40
  text "5" at 471.75,925.61 h40
  text "4" at 566.75,925.61 h40
  text "9" at 268,923 h40
  text "GND" at 628,923 h40
  text "5V" at 768,923 h40
  text "8" at 366.75,920.61 h40
  text "3V3" at 958,863 h40
  text "GND" at 18,733 h40
  text "RX" at 148,733 h40
  text "TX" at 248,733 h40
  text "18" at 353,733 h40
  text "19" at 453,733 h40
  text "3" at 566.75,730.61 h40
  text "2" at 661.75,730.61 h40
  text "1" at 773,728 h40
  text "0" at 863,728 h40
  text "RST" at 1718,253 h40
Bottom Overlay:
  drawing of 28 lines, arcs and shapes, not listed
  text "Node Controller V2 Rev 0" at 1345,1265 h40
  text "Project FishWorks - 2024" at 1345,1198.33 h40
  text "JLCJLCJLCJLC" at 517,53 h30